# Altium PCB Twintig-FCC-Metacarpal-RA.PcbDoc
Units mm, origin at the board's own origin, x right, y up, seen from the top; angles counter-clockwise.
Board outline 12 x 12 mm, 2 copper layers (Top Copper, Bottom Copper), stack 0.32 mm thick; 2 components, 20 nets, 44 pads, 20 vias.
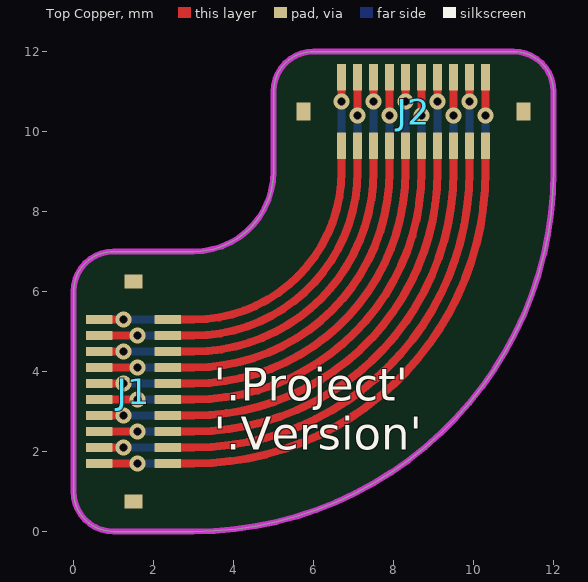
[diagram p0: Top Copper view]
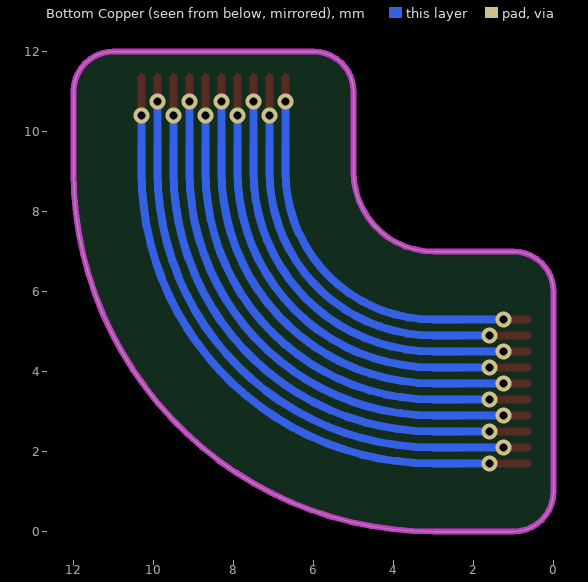
[diagram p1: Bottom Copper view, seen from below]

## Layer stack, top to bottom
Top Coverlay: solder mask 0.0125, FC-001, Dk 4
Top Adhesive: prepreg 0.015, PP-006, Dk 4.1
Top Copper: signal copper 0.035
Polyimide: core 0.025, Core-009, Dk 4.5
Bottom Copper: signal copper 0.035
Bottom Adhesive: prepreg 0.015, PP-006, Dk 4.1
Bottom Coverlay: solder mask 0.0125, FC-001, Dk 4
Stiffener: core 0.195, Core-009, Dk 4.5

## Board outline
3,0 ccw(c3,9) 12,9 12,11 ccw(c11,11) 11,12 6,12 ccw(c6,11) 5,11 5,9 cw(c3,9) 3,7 1,7 ccw(c1,6) 0,6 0,1 ccw(c1,1) 1,0
board region "Layer Stack Region 2": 5,11 5,9 12,9 12,11 12,11.098 11.962,11.292 11.886,11.474 11.777,11.637 11.637,11.777 11.474,11.886 11.292,11.962 11.098,12 11,12 6,12 5.902,12 5.708,11.962 5.526,11.886 5.363,11.777 5.223,11.637 5.114,11.474 5.038,11.292 5,11.098
board region "Layer Stack Region 1": 1,0 3,0 3,7 1,7 0.902,7 0.708,6.962 0.526,6.886 0.363,6.777 0.223,6.637 0.114,6.474 0.038,6.292 0,6.098 0,6 0,1 0,0.902 0.038,0.708 0.114,0.526 0.223,0.363 0.363,0.223 0.526,0.114 0.708,0.038 0.902,0
board region "Default Layer Stack Region": 3,0 3.442,0 4.322,0.087 5.189,0.259 6.036,0.516 6.853,0.854 7.632,1.271 8.368,1.762 9.051,2.323 9.677,2.949 10.238,3.632 10.729,4.367 11.146,5.147 11.484,5.964 11.741,6.811 11.913,7.678 12,8.558 12,9 5,9 4.99,8.804 4.914,8.419 4.764,8.057 4.546,7.731 4.269,7.454 3.943,7.236 3.581,7.086 3.196,7.01 3,7

## Design rules (kind name [scope] priority, off if disabled: settings)
Clearance ClearanceInternal [OnMid] p1: gap=0.2 ignorepadtopadclearanceinfootprint=FALSE
Clearance [All] p2: gap=0.1 ignorepadtopadclearanceinfootprint=FALSE except(0: Arc-Hole Track-Hole SMDPad-Hole THPad-Hole Via-Hole Fill-Hole Poly-Hole Region-Hole Text-Hole)
DiffPairsRouting [All] p1: maxlimit=0.254 minlimit=0.1 mostfreqgap=0.1 toplayer_minwidth=0.1 toplayer_maxwidth=0.381 toplayer_prefwidth=0.1 bottomlayer_minwidth=0.1 bottomlayer_maxwidth=0.381 bottomlayer_prefwidth=0.1 substack1={69A61E63-F9A3-4718-8339-400A0B522E4B} toplayer_{69a61e63-f9a3-4718-8339-400a0b522e4b}_minwidth=0.381 toplayer_{69a61e63-f9a3-4718-8339-400a0b522e4b}_maxwidth=0.381 toplayer_{69a61e63-f9a3-4718-8339-400a0b522e4b}_prefwidth=0.381 bottomlayer_{69a61e63-f9a3-4718-8339-400a0b522e4b}_minwidth=0.381 bottomlayer_{69a61e63-f9a3-4718-8339-400a0b522e4b}_maxwidth=0.381 bottomlayer_{69a61e63-f9a3-4718-8339-400a0b522e4b}_prefwidth=0.381 maxuncoupledlength=12.7
HoleSize [All] p1: absolutevalues=TRUE maxlimit=10 minlimit=0.025 maxpercent=80.000 minpercent=20.000
MinimumSolderMaskSliver [All] p1: minsoldermaskwidth=0
PlaneClearance [All] p1: clearance=0.2
PlaneConnect [All] p1: planeconnectstyle=Direct reliefexpansion=0.508 reliefentries=4 reliefconductorwidth=0.254 reliefairgap=0.254
PolygonConnect [All] p1: thpad.connectstyle=Relief thpad.reliefconductorwidth=0.254 thpad.reliefentries=4 thpad.polygonreliefangle="90 Angle" thpad.airgapwidth=0.1 smdpad.connectstyle=Relief smdpad.reliefconductorwidth=0.254 smdpad.reliefentries=4 smdpad.polygonreliefangle="90 Angle" smdpad.airgapwidth=0.1 via.connectstyle=Direct via.reliefconductorwidth=0.254 via.reliefentries=4 via.polygonreliefangle="90 Angle" via.airgapwidth=0.254
RoutingVias [All] p1: holewidth=0.711 width=1.27 viastyle="Through Hole" minholewidth=0.15 minwidth=0.35 maxholewidth=0.711 maxwidth=1.27
SilkToSolderMaskClearance [IsPad] p1: minsilkscreentomaskgap=0.1 clearancetoexposedcopper=TRUE
SolderMaskExpansion [All] p1: expansion=0.102 istentingtop=FALSE
Width [All] p1: maxlimit=1 minlimit=0.05 preferedwidth=0.1 substack1={69A61E63-F9A3-4718-8339-400A0B522E4B}
24 further rules are at their usual default settings.

## Components (designator, comment, footprint, x,y, rotation, side; value= is the part's Value field where it differs from the comment)
J1 "Molex 502430-2030" "MOLEX 502430-2030" 1.5,3.5 r90 top
J2 "Molex 502430-2030" "MOLEX 502430-2030" 8.5,10.5 r180 top

## Footprints (in the part's own frame and the unit in brackets; to place one, negate y for a bottom-side part, rotate by r counter-clockwise, add the part's x,y. Pads: shape width x height; smd on the part's side, far side on the other; paste and mask are expansions set on the pad)
"MOLEX 502430-2030" [mm]
  rect 0.22x0.66 smd: 1(-1.8,-0.855) 2(-1.4,-0.855) 3(-1,-0.855) 4(-0.6,-0.855) 5(-0.2,-0.855) 6(0.2,-0.855) 7(0.6,-0.855) 8(1,-0.855) 9(1.4,-0.855) 10(1.8,-0.855) 11(-1.8,0.855) 12(-1.4,0.855) 13(-1,0.855) 14(-0.6,0.855) 15(-0.2,0.855) 16(0.2,0.855) 17(0.6,0.855) 18(1,0.855) 19(1.4,0.855) 20(1.8,0.855)
  rect 0.35x0.44 smd: "Fitting Nail"(-2.75,0) "Fitting Nail"(2.75,0)
  body extent -3.13,-1.04 3.13,1.04, height 0.78

## Via types
v1: diameter 0.4, hole 0.2, Top Copper to Bottom Copper, tented both sides, 20 vias

## Nets (pads, with @x,y where several pads share a name; then routed paths per layer and width w, separated by ;. In a path a pad name is that pad's centre, name@x,y a point inside that pad or via, vN(x,y) a via of type N, cw(c..) or ccw(c..) an arc to the next point about the centre after c; other vN are vias at no path point)
1: J1.1 J2.11 | length 12.8
  Top Copper w0.2: J1.1 3,1.7 ccw(c3,9) 10.3,9 J2.11
2: J1.2 J2.12 | length 12.1
  Top Copper w0.2: J1.2 3,2.1 ccw(c3,9) 9.9,9 J2.12
3: J1.3 J2.13 | length 11.5
  Top Copper w0.2: J1.3 3,2.5 ccw(c3,9) 9.5,9 J2.13
4: J1.4 J2.14 | length 10.9
  Top Copper w0.2: J1.4 3,2.9 ccw(c3,9) 9.1,9 J2.14
5: J1.5 J2.15 | length 10.2
  Top Copper w0.2: J1.5 3,3.3 ccw(c3,9) 8.7,9 J2.15
6: J1.6 J2.16 | length 9.6
  Top Copper w0.2: J1.6 3,3.7 ccw(c3,9) 8.3,9 J2.16
7: J1.7 J2.17 | length 9
  Top Copper w0.2: J1.7 3,4.1 ccw(c3,9) 7.9,9 J2.17
8: J1.8 J2.18 | length 8.4
  Top Copper w0.2: J1.8 3,4.5 ccw(c3,9) 7.5,9 J2.18
9: J1.9 J2.19 | length 7.7
  Top Copper w0.2: J1.9 3,4.9 ccw(c3,9) 7.1,9 J2.19
10: J1.10 J2.20 | length 7.1
  Top Copper w0.2: J1.10 3,5.3 ccw(c3,9) 6.7,9 J2.20
11: J1.11 J2.1 | length 16.2
  Top Copper w0.2: J1.11 v1(1.6,1.7) ; v1(10.3,10.4) J2.1
  Bottom Copper w0.2: v1(1.6,1.7) 3,1.7 ccw(c3,9) 10.3,9 v1(10.3,10.4)
12: J1.12 J2.2 | length 15.5
  Top Copper w0.2: J1.12 v1(1.25,2.1) ; v1(9.9,10.75) J2.2
  Bottom Copper w0.2: v1(1.25,2.1) 3,2.1 ccw(c3,9) 9.9,9 v1(9.9,10.75)
13: J1.13 J2.3 | length 14.9
  Top Copper w0.2: J1.13 v1(1.6,2.5) ; v1(9.5,10.4) J2.3
  Bottom Copper w0.2: v1(1.6,2.5) 3,2.5 ccw(c3,9) 9.5,9 v1(9.5,10.4)
14: J1.14 J2.4 | length 14.3
  Top Copper w0.2: J1.14 v1(1.25,2.9) ; v1(9.1,10.75) J2.4
  Bottom Copper w0.2: v1(1.25,2.9) 3,2.9 ccw(c3,9) 9.1,9 v1(9.1,10.75)
15: J1.15 J2.5 | length 13.7
  Top Copper w0.2: J1.15 v1(1.6,3.3) ; v1(8.7,10.4) J2.5
  Bottom Copper w0.2: v1(1.6,3.3) 3,3.3 ccw(c3,9) 8.7,9 v1(8.7,10.4)
16: J1.16 J2.6 | length 13
  Top Copper w0.2: J1.16 v1(1.25,3.7) ; v1(8.3,10.75) J2.6
  Bottom Copper w0.2: v1(1.25,3.7) 2.985,3.7 ccw(c2.985,8.015) 3,3.7 ; 3.003,3.703 ccw(c2.985,9.018) 8.3,9 ccw(c3.985,9.015) 8.3,9.015 v1(8.3,10.75)
17: J1.17 J2.7 | length 12.4
  Top Copper w0.2: J1.17 v1(1.6,4.1) ; v1(7.9,10.4) J2.7
  Bottom Copper w0.2: v1(1.6,4.1) 3,4.1 ccw(c3,9) 7.9,9 v1(7.9,10.4)
18: J1.18 J2.8 | length 11.8
  Top Copper w0.2: J1.18 v1(1.25,4.5) ; v1(7.5,10.75) J2.8
  Bottom Copper w0.2: v1(1.25,4.5) 3,4.5 ccw(c3,9) 7.5,9 v1(7.5,10.75)
19: J1.19 J2.9 | length 11.2
  Top Copper w0.2: J1.19 v1(1.6,4.9) ; v1(7.1,10.4) J2.9
  Bottom Copper w0.2: v1(1.6,4.9) 3,4.9 ccw(c3,9) 7.1,9 v1(7.1,10.4)
20: J1.20 J2.10 | length 10.5
  Top Copper w0.2: J1.20 v1(1.25,5.3) ; v1(6.7,10.75) J2.10
  Bottom Copper w0.2: v1(1.25,5.3) 3,5.3 ccw(c3,9) 6.7,9 v1(6.7,10.75)
pads on no net: "J1.Fitting Nail" "J2.Fitting Nail"

## Polygon pours and split planes (outlines as drawn)
no net on Mechanical 1 "NONET_L-01_P-001" (solid): 5,11 cw(c6,11) 6,12 11,12 cw(c11,11) 12,11 12,9 5,9
no net on Mechanical 1 "NONET_L-01_P-001" (solid): 1,0 cw(c1,1) 0,1 0,6 cw(c1,6) 1,7 3,7 3,0
no net on Layer0 "Default Coverlay 1 Top" (split plane): 5,11 5,9 12,9 12,11 12,11.098 11.962,11.292 11.886,11.474 11.777,11.637 11.637,11.777 11.474,11.886 11.292,11.962 11.098,12 11,12 6,12 5.902,12 5.708,11.962 5.526,11.886 5.363,11.777 5.223,11.637 5.114,11.474 5.038,11.292 5,11.098
no net on Layer0 "Default Coverlay 1 Top" (split plane): 1,0 3,0 3,7 1,7 0.902,7 0.708,6.962 0.526,6.886 0.363,6.777 0.223,6.637 0.114,6.474 0.038,6.292 0,6.098 0,6 0,1 0,0.902 0.038,0.708 0.114,0.526 0.223,0.363 0.363,0.223 0.526,0.114 0.708,0.038 0.902,0
no net on Layer0 "Default Coverlay 1 Bottom" (split plane): 5,11 5,9 12,9 12,11 12,11.098 11.962,11.292 11.886,11.474 11.777,11.637 11.637,11.777 11.474,11.886 11.292,11.962 11.098,12 11,12 6,12 5.902,12 5.708,11.962 5.526,11.886 5.363,11.777 5.223,11.637 5.114,11.474 5.038,11.292 5,11.098
no net on Layer0 "Default Coverlay 1 Bottom" (split plane): 1,0 3,0 3,7 1,7 0.902,7 0.708,6.962 0.526,6.886 0.363,6.777 0.223,6.637 0.114,6.474 0.038,6.292 0,6.098 0,6 0,1 0,0.902 0.038,0.708 0.114,0.526 0.223,0.363 0.363,0.223 0.526,0.114 0.708,0.038 0.902,0
no net on Layer0 "Default Coverlay 2 Top" (split plane): 3,0 3.442,0 4.322,0.087 5.189,0.259 6.036,0.516 6.853,0.854 7.633,1.271 8.368,1.762 9.051,2.323 9.677,2.949 10.238,3.632 10.729,4.367 11.146,5.147 11.484,5.964 11.741,6.811 11.913,7.678 12,8.558 12,9 5,9 4.99,8.804 4.914,8.419 4.764,8.057 4.546,7.731 4.269,7.454 3.943,7.236 3.581,7.086 3.196,7.01 3,7
no net on Layer0 "Default Coverlay 2 Bottom" (split plane): 3,0 3.442,0 4.322,0.087 5.189,0.259 6.036,0.516 6.853,0.854 7.633,1.271 8.368,1.762 9.051,2.323 9.677,2.949 10.238,3.632 10.729,4.367 11.146,5.147 11.484,5.964 11.741,6.811 11.913,7.678 12,8.558 12,9 5,9 4.99,8.804 4.914,8.419 4.764,8.057 4.546,7.731 4.269,7.454 3.943,7.236 3.581,7.086 3.196,7.01 3,7

## Keep-outs
Keep-Out Layer:
  the board outline again, w0.15

## Silkscreen, mask and mechanical layers (free items; w line width, h text height)
Top Overlay:
  text "'.Project'" at 3.5,3 h1.4
  text "'.Version'" at 3.5,1.766 h1.4